# Altium PCB layout.PcbDoc (part 3 of 3)
Units mm, origin at the board's own origin, x right, y up, seen from the top; angles counter-clockwise.
Board outline 100.08 x 22.99 mm, 2 copper layers (Top Layer, Bottom Layer); 117 components, 109 nets, 394 pads, 168 vias.
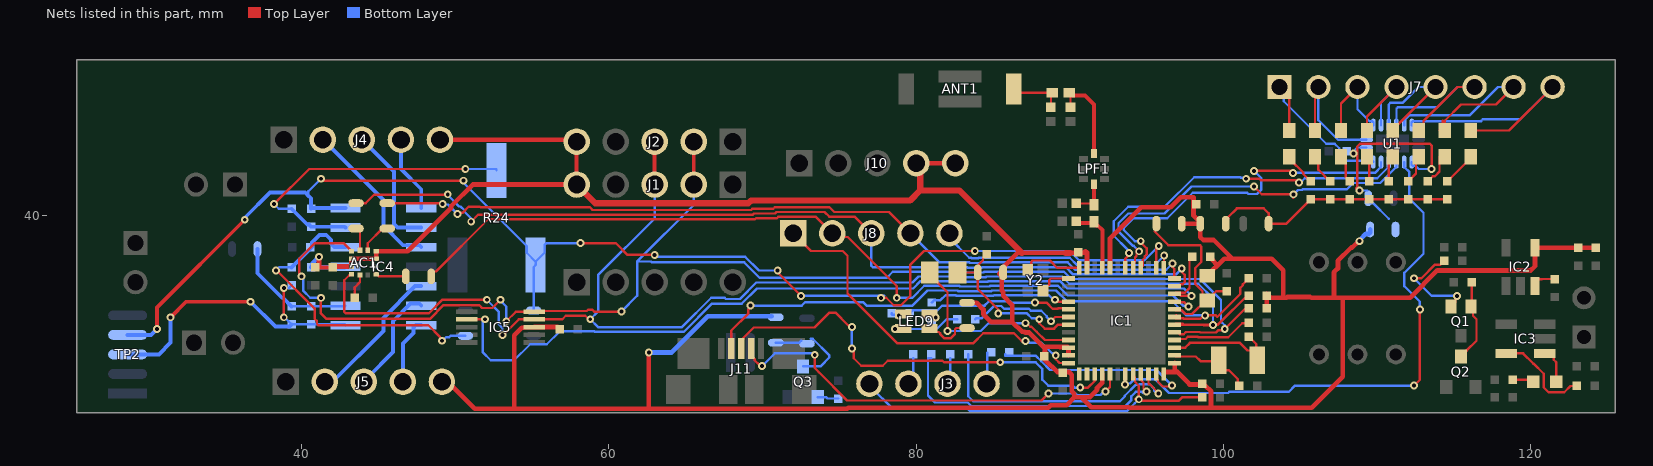
[diagram p2: the nets of this part, all layers, seen from the top]

## Via types
v1: diameter 0.508, hole 0.254, Top Layer to Bottom Layer, 166 vias
v2: diameter 1.016, hole 0.508, Top Layer to Bottom Layer, 2 vias

## Nets (pads, with @x,y where several pads share a name; then routed paths per layer and width w, separated by ;. In a path a pad name is that pad's centre, name@x,y a point inside that pad or via, vN(x,y) a via of type N, cw(c..) or ccw(c..) an arc to the next point about the centre after c; other vN are vias at no path point) (continued)
I2C1_SCL: AC1.1 IC1.5 IC5.10 J1.2 J2.2 R15.1 | length 90.2
  Top Layer w0.152: v1(40.005,36.068) 39.878,36.068 39.878,37.211 40.894,38.227 42.749,38.227 AC1.1@43.269,37.707 ; v1(41.275,34.671) 41.275,33.655 41.631,33.299 48.365,33.299 49.261,34.195 51.575,34.195 51.76,34.011 52.426,34.011 v1(52.959,34.544) ; v1(53.34,33.147) 53.959,33.766 IC5.10@55.159,33.766 55.2,33.807 58.575,33.807 58.654,33.886 58.948,33.886 59.068,33.766 60.817,33.766 v1(60.833,33.782) ; IC1.5@97.155,32.304 97.413,32.304 97.551,32.442 98.447,32.442 98.479,32.41 99.514,32.41 99.674,32.571 100.008,32.571 v1(100.076,32.639) 101.427,33.99 R15.1@101.651,33.99
  Top Layer w0.254: J1.2@65.532,42.037 J2.2@65.532,44.831
  Bottom Layer w0.152: v1(40.005,36.068) 40.005,35.972 40.136,35.84 40.136,35.114 40.582,34.669 41.277,34.669 v1(41.275,34.671) ; v1(52.959,34.544) 52.959,34.487 53.34,34.106 v1(53.34,33.147) ; v1(60.833,33.782) 61.85,34.799 61.85,37.028 ; J1.2@65.532,42.037 65.532,40.709 61.85,37.028 ; v1(100.076,32.639) 100.076,32.882 99.836,33.122 99.836,34.53 98.476,35.89 90.088,35.89 89.613,36.364 84.441,36.364 84.399,36.322 83.241,36.322 83.199,36.364 78.483,36.364 78.085,35.966 69.825,35.966 68.809,36.982 62.792,36.982 62.747,37.028 61.85,37.028
I2C1_SDA: AC1.4 IC1.6 IC5.9 J1.3 J2.3 R16.1 | length 85.8
  Top Layer w0.152: AC1.4@43.269,36.207 43.192,36.207 43.192,36.155 43.17,36.133 43.118,36.133 42.799,35.814 42.799,33.744 42.888,33.655 48.289,33.655 49.185,34.551 52.063,34.551 v1(52.07,34.544) ; v1(53.086,32.258) 53.133,32.258 54.142,33.266 54.666,33.266 IC5.9@54.737,33.337 ; IC5.9@55.159,33.266 56.974,33.266 57.211,33.503 58.476,33.503 58.705,33.274 v1(58.801,33.274) ; 97.357,32.996 96.887,32.996 IC1.6@96.816,32.925 96.887,32.925 97.357,32.925 98.664,32.925 ; R16.1@101.651,34.936 99.639,32.925 v1@99.282,32.925 ; 98.664,32.925 v1@99.282,32.925 ; 98.664,32.925 98.696,32.893 v1(99.314,32.893) v1@99.282,32.925
  Top Layer w0.254: J1.3@62.992,42.037 J2.3@62.992,44.831
  Bottom Layer w0.152: v1(52.07,34.544) 52.857,33.757 52.857,32.947 53.064,32.741 53.064,32.28 v1(53.086,32.258) ; J1.3@62.992,42.037 62.992,39.831 59.31,36.149 59.31,33.783 v1(58.801,33.274) 59.309,32.766 64.77,32.766 66.675,34.671 67.545,34.671 67.62,34.596 68.534,34.596 69.6,35.662 79.765,35.662 80.163,36.059 83.073,36.059 83.115,36.017 84.525,36.017 84.567,36.059 89.487,36.059 89.961,35.585 98.35,35.585 99.314,34.621 v1(99.314,32.893)
I2C1_SMBA: IC1.10 IC5.2 R14.1 | length 56.7
  Top Layer w0.152: IC5.2@50.759,33.266 50.767,33.274 v1(51.943,33.274) ; v1(97.917,34.798) 97.341,34.798 97.336,34.804 97.212,34.804 97.091,34.925 IC1.10@96.816,34.925 96.887,34.996 97.48,34.996 97.79,35.306 97.79,37.16 R14.1@97.968,37.338
  Bottom Layer w0.152: v1(51.943,33.274) 51.905,33.274 51.816,33.185 51.816,31.115 52.324,30.607 53.848,30.607 54.889,31.648 55.975,31.648 56.813,32.487 59.055,32.487 59.08,32.461 64.896,32.461 66.726,34.291 68.661,34.291 69.65,35.281 79.815,35.281 80.289,35.755 82.947,35.755 82.989,35.712 84.651,35.712 84.693,35.755 89.361,35.755 89.835,35.281 97.434,35.281 v1(97.917,34.798)
LED_1_BLUE: IC1.28 R38.1 | length 9.2
  Top Layer w0.152: v1@89.027,34.425 IC1.28@89.916,34.425
  Bottom Layer w0.152: R38.1@81.026,34.366 81.179,34.519 81.589,34.519 81.91,34.84 82.568,34.84 82.61,34.798 85.03,34.798 85.072,34.84 88.641,34.84 88.937,34.544 v1(89.027,34.544)
LED_1_GREEN: IC1.29 R39.2 | length 10.9
  Top Layer w0.152: v1(87.732,34.358) 88.489,34.358 88.895,33.952 89.197,33.952 89.244,33.999 89.662,33.999 89.736,33.925 IC1.29@89.916,33.925
  Bottom Layer w0.152: R39.2@79.578,33.655 79.777,33.854 80.582,33.854 80.591,33.863 81.396,33.863 81.696,34.163 84.455,34.163 84.734,34.442 86.143,34.442 86.227,34.358 v1@87.689,34.358
LED_1_RED: IC1.30 R37.2 | length 7.1
  Top Layer w0.152: v1@88.773,33.243 v1(88.773,33.147) 89.051,33.425 IC1.30@89.916,33.425
  Bottom Layer w0.152: R37.2@83.845,33.274 83.904,33.333 84.26,33.333 85.065,34.138 85.544,34.138 85.722,33.96 87.34,33.96 87.467,33.833 88.135,33.833 88.494,33.474 88.494,33.414 88.761,33.147 v1(88.773,33.147)
LED_MOSI: IC1.16 U1.14 | length 23.9
  Top Layer w0.152: v1(94.615,38.354) 94.615,38.274 94.996,37.894 94.996,37.494 94.869,37.367 94.869,37.276 94.737,37.145 94.737,36.746 IC1.16@94.616,36.625 ; v1(101.981,42.926) 104.394,42.926 v1(104.521,42.799)
  Bottom Layer w0.152: v1(94.615,38.354) 94.234,38.354 93.503,39.085 93.503,39.211 93.84,39.548 94.145,39.853 96.341,39.853 97.992,41.504 101.546,41.504 101.622,41.427 102.181,41.427 102.464,41.71 102.464,42.443 v1(101.981,42.926) ; v1(104.521,42.799) 109.853,42.799 110.248,43.194 U1.14@110.248,43.504
LED_PWM: IC1.18 U1.13 | length 23.7
  Top Layer w0.152: IC1.18@93.616,36.625 93.616,37.228 93.853,37.465 v1(93.853,37.592) ; v1(101.473,42.418) 102.315,42.418 102.416,42.316 104.715,42.316 104.715,42.097 104.781,42.164 v1(104.902,42.164)
  Bottom Layer w0.152: v1(93.853,37.592) 93.853,37.688 93.728,37.814 93.728,37.844 92.862,38.71 92.862,39.649 93.801,40.588 96.164,40.588 98.096,42.52 101.091,42.52 101.125,42.486 101.405,42.486 v1(101.473,42.418) ; v1(104.902,42.164) 104.998,42.164 105.282,42.448 110.002,42.448 110.748,43.194 U1.13@110.748,43.504
LED_PWR: R29.2 R30.2 R31.2 R32.2 R33.2 R34.2 R35.2 R36.2 SB13.2 SB14.2 | length 16.4
  Top Layer w0.152: SB14.2@100.139,39.497 100.139,39.649 100.304,39.813 100.304,39.921 100.87,40.488 102.616,40.488 102.933,40.17 SB13.2@102.933,39.497 104.089,39.497 R29.2@105.664,41.072 R30.2@106.934,41.072 R31.2@108.204,41.072 R32.2@109.474,41.072 R33.2@110.744,41.072 R34.2@112.014,41.072 R35.2@113.284,41.072 R36.2@114.554,41.072
LED_SCK: IC1.43 U1.11 | length 36.4
  Top Layer w0.152: v1(93.599,29.032) 93.599,29.464 93.616,29.481 IC1.43@93.616,29.725 ; v1(112.395,28.956) 112.776,29.337 v1(112.776,33.909)
  Bottom Layer w0.152: v1(93.599,29.032) 93.662,29.095 93.914,29.095 94.181,29.362 95.558,29.362 96.447,28.473 100.306,28.473 100.382,28.55 104.242,28.55 104.648,28.956 v1(112.395,28.956) ; U1.11@111.748,43.504 111.748,43.194 112.091,42.851 112.091,41.119 113.005,40.205 113.005,37.538 111.76,36.293 111.76,35.433 112.776,34.417 v1(112.776,33.909)
LED_SS: IC1.17 U1.12 | length 24.4
  Top Layer w0.152: IC1.17@94.116,36.625 94.116,36.883 94.19,36.957 94.19,36.974 94.237,37.021 94.237,37.294 94.336,37.392 v1@94.336,37.694 ; v1@94.336,37.846 94.488,37.694 v1(94.513,37.694) ; v1(101.981,41.91) 102.489,41.402 v1(104.542,41.402) v1@104.542,41.169
  Bottom Layer w0.152: v1(94.513,37.694) 94.158,38.049 94.108,38.049 93.167,38.99 93.167,39.523 93.801,40.157 96.164,40.157 97.917,41.91 v1(101.981,41.91) ; v1(104.542,41.402) 104.563,41.402 104.842,41.681 105.102,41.681 105.153,41.732 108.03,41.732 108.436,42.139 110.193,42.139 111.248,43.194 U1.12@111.248,43.504
LH_SIG: IC1.14 IC4.7 R24.1 R25.1 SB26.1 TP2.4 | length 89.2
  Top Layer w0.152: v1(41.275,42.418) 41.402,42.291 v1(50.546,42.291) ; v1(58.166,38.227) 60.452,38.227 61.214,37.465 v1(62.992,37.465) ; v1(70.993,36.449) 70.993,36.322 v1(72.517,34.798) ; v1(77.724,34.671) 78.058,34.671 78.54,34.188 79.019,34.188 79.629,34.798 79.629,36.83 80.518,37.719 v1(83.82,37.719) ; IC1.14@95.616,36.625 95.616,37.954 95.705,38.043 v1(95.783,38.043)
  Top Layer w0.254: v1(30.607,32.639) 30.607,34.036 v1(36.322,39.751)
  Bottom Layer w0.152: 40.45,41.338 40.45,41.593 v1(41.275,42.418) ; v1(50.546,42.291) 50.419,42.291 54.666,38.044 54.666,37.597 R24.1@55.245,37.019 ; SB26.1@55.118,33.846 55.118,36.676 R24.1@55.245,36.803 R24.1@55.245,37.019 ; v1(58.166,38.227) 55.951,38.227 55.824,38.1 55.824,37.597 R24.1@55.245,37.019 ; v1(62.992,37.465) 63.125,37.332 68.89,37.332 69.773,36.449 v1(70.993,36.449) ; v1(72.517,34.798) v1@77.931,34.798 ; v1(83.82,37.719) 89.983,37.719 90.593,37.109 94.849,37.109 v1(95.783,38.043)
  Bottom Layer w0.254: TP2.4@28.702,32.258 30.226,32.258 v1(30.607,32.639) ; v1(36.322,39.751) 36.322,39.878 37.973,41.529 40.259,41.529 40.45,41.338 40.64,41.148 R25.1@40.64,40.462 40.691,40.513 IC4.7@42.875,40.513
LPF_OUT: C19.2 IC4.5 R23.1 SB25.1 | length 21
  Top Layer w0.152: v1(38.354,36.449) 38.401,36.449 40.869,33.982 40.869,33.307 41.021,33.155 41.021,32.982 41.11,32.893 48.26,32.893 49.024,32.129 49.024,32.099 49.149,31.973 v1(49.149,31.877)
  Bottom Layer w0.152: v1(38.354,36.449) 38.557,36.652 C19.2@39.37,36.652 ; v1(49.149,31.877) 49.187,31.877 49.416,32.106 49.624,32.106 49.713,32.194 SB25.1@50.673,32.194
  Bottom Layer w0.254: C19.2@39.37,36.652 40.691,37.973 40.691,38.27 41.181,38.76 41.623,38.76 41.935,38.448 41.935,38.202 42.164,37.973 IC4.5@42.875,37.973
NetAC1_5: AC1.5 C25.1 | length 1.6
  Top Layer w0.152: C25.1@43.485,34.671 43.485,35.357 43.819,35.691 AC1.5@43.819,36.157
NetAC1_7: AC1.7 SB16.1 | length 2
  Top Layer w0.152: AC1.7@44.869,36.207 44.894,36.207 45.033,36.068 SB16.1@46.799,36.068
NetAC1_11: AC1.11 SB18.1 | length 2.1
  Top Layer w0.152: AC1.11@44.319,37.757 44.319,38.223 45.276,39.179 SB18.1@45.593,39.179
  Top Layer w0.254: AC1.11@44.319,37.757 AC1.11@44.323,37.761
NetAC1_12: AC1.12 SB17.1 | length 1.6
  Top Layer w0.152: SB17.1@43.561,39.179 43.655,39.179 43.819,39.015 AC1.12@43.819,37.757
NetANT1_1: ANT1.1 C28.2 L3.2 | length 3.6
  Top Layer w0.152: ANT1.1@86.36,48.26 86.614,48.006 L3.2@88.858,48.006 88.773,47.921 C28.2@88.773,47.069
NetC5_2: C5.2 L1.2 LPF1.8 | length 2.6
  Top Layer w0.152: C5.2@90.424,40.809 91.482,40.809 L1.2@91.567,40.724
  Top Layer w0.254: L1.2@91.567,40.724 LPF1.8@91.567,42.18
NetC16_1: C16.1 IC2.3 | length 1.6
  Top Layer w0.152: IC2.3@120.269,35.433 120.269,35.649 120.493,35.872 120.708,35.872 120.726,35.89 C16.1@121.539,35.89
NetC20_2: C20.2 IC4.2 R26.1 SB15.2 | length 8.2
  Bottom Layer w0.152: R26.1@39.37,34.112 C20.2@40.64,34.112 42.824,34.112 IC4.2@42.875,34.163
  Bottom Layer w0.254: SB15.2@37.148,37.846 37.148,36.266 38.741,34.673 38.81,34.673 R26.1@39.37,34.112
NetC26_2: C26.2 SB23.2 SB24.2 U1.10 U1.16 | length 14.3
  Top Layer w0.152: v1(108.839,41.656) 108.788,41.656 108.641,41.804 108.708,41.871 108.708,42.61 108.7,42.617 108.7,44.514 108.89,44.704 113.411,44.704 113.538,44.577 v1(113.538,43.053)
  Bottom Layer w0.152: 108.585,44.323 108.716,44.454 U1.16@109.298,44.454 ; v1(108.839,41.656) 109.347,41.656 ; SB23.2@109.41,41.148 109.41,40.996 109.575,40.832 109.726,40.832 110.744,39.814 ; U1.10@112.248,43.504 112.248,43.319 112.316,43.251 112.501,43.251 112.699,43.053 v1(113.538,43.053)
  other v1: 108.458,44.069
NetC27_2: C27.2 L3.1 LPF1.4 | length 5.8
  Top Layer w0.152: L3.1@89.958,48.006 90.043,47.921 C27.2@90.043,47.069
  Top Layer w0.254: L3.1@90.043,47.921 90.131,47.833 90.978,47.833 91.567,47.244 LPF1.4@91.567,44.18
NetD1_4: 
NetD1_6: 
NetDS1_1: DS1.1 R18.1 | length 1.4
  Top Layer w0.152: R18.1@118.821,29.337 120.027,29.337 DS1.1@120.154,29.21
NetDS1_2: DS1.2 IC3.1 | length 2.4
  Top Layer w0.152: IC3.1@120.884,31.054 121.261,31.054 121.485,30.83 121.485,30.637 121.654,30.468 DS1.2@121.654,29.21
NetIC1_4: IC1.4 R17.2 | length 5
  Top Layer w0.152: IC1.4@97.155,31.996 97.536,31.996 97.678,32.138 98.321,32.138 98.353,32.106 100.305,32.106 101.219,33.02 101.628,33.02 R17.2@101.651,33.043
NetIC3_5: IC3.5 R19.2 | length 6.3
  Top Layer w0.152: IC3.5@118.384,31.054 119.489,31.054 120.153,30.39 120.169,30.39 120.833,29.726 120.833,28.835 121.138,28.531 122.17,28.531 122.572,28.933 122.964,28.933 R19.2@122.987,28.956
NetIC4_6: IC4.6 R24.2 R25.2 R27.2 | length 20.8
  Top Layer w0.152: v1(38.227,40.767) 40.513,43.053 v1(50.673,43.053)
  Bottom Layer w0.152: v1(38.227,40.767) 38.532,40.462 R27.2@39.37,40.462 ; v1(50.673,43.053) 52.705,43.053 R24.2@52.705,42.953
  Bottom Layer w0.254: R27.2@39.37,40.462 40.39,39.442 40.492,39.442 R25.2@40.64,39.294 42.824,39.294 IC4.6@42.875,39.243
NetJ3_2: J3.2 R1.2 | length 2.5
  Bottom Layer w0.152: R1.2@84.633,31.115 84.633,28.905 J3.2@84.836,28.702
NetJ3_3: J3.3 R2.2 | length 2.1
  Bottom Layer w0.152: R2.2@82.22,30.734 82.22,28.778 J3.3@82.296,28.702
NetJ3_4: J3.4 R3.2 | length 2.2
  Bottom Layer w0.152: J3.4@79.756,28.575 79.756,28.702 79.807,28.753 R3.2@79.807,30.734
NetLED1_2: LED1.2 R29.1 | length 2.1
  Top Layer w0.152: LED1.2@104.394,43.854 104.394,43.608 105.184,42.819 105.184,42.721 R29.1@105.664,42.24
NetLED2_2: LED2.2 R30.1 | length 1.9
  Top Layer w0.152: LED2.2@106.172,43.854 106.172,43.002 R30.1@106.934,42.24
NetLED3_2: LED3.2 R31.1 | length 1.7
  Top Layer w0.152: LED3.2@107.95,43.854 107.95,42.494 R31.1@108.204,42.24
NetLED4_2: LED4.2 R32.1 | length 1.6
  Top Layer w0.152: R32.1@109.474,42.24 LED4.2@109.474,43.854
NetLED5_2: LED5.2 R33.1 | length 1.7
  Top Layer w0.152: R33.1@110.744,42.24 110.744,43.6 LED5.2@110.998,43.854
NetLED6_2: LED6.2 R34.1 | length 1.8
  Top Layer w0.152: R34.1@112.014,42.24 112.522,42.748 LED6.2@112.522,43.854
NetLED7_2: LED7.2 R35.1 | length 2
  Top Layer w0.152: R35.1@113.284,42.24 113.614,42.57 113.738,42.57 114.046,42.878 LED7.2@114.046,43.854
NetLED8_2: LED8.2 R36.1 | length 2.7
  Top Layer w0.152: R36.1@114.554,42.24 116.167,43.853 116.122,43.898 LED8.2@115.868,44.152
NetLED9_1: LED9.1 SB22.2 | length 3.2
  Top Layer w0.152: LED9.1@80.86,32.672 81.084,32.448 81.47,32.448 81.559,32.359 81.559,32.312 81.842,32.029 82.242,32.029 82.525,32.312 82.525,32.613 82.614,32.703 SB22.2@83.312,32.703
NetLED9_2: LED9.2 R38.2 | length 0.5
  Top Layer w0.152: v1(81.28,33.38) LED9.2@81.28,33.528
  Bottom Layer w0.152: R38.2@81.026,33.198 81.225,33.397 81.276,33.397 81.28,33.392 v1(81.28,33.38)
NetLED9_3: LED9.3 R39.1 | length 0.5
  Bottom Layer w0.152: R39.1@78.41,33.655 78.41,33.604 78.443,33.571 78.824,33.571 v1(78.867,33.528)
NetLED9_4: LED9.4 R37.1 | length 4.3
  Bottom Layer w0.152: v1(78.613,32.639) 80.772,32.639 80.827,32.694 81.396,32.694 81.975,33.274 R37.1@82.677,33.274
NetQ1_1: Q1.1 Q2.3 R20.1 | length 5.5
  Top Layer w0.152: Q2.3@115.443,30.861 115.443,30.911 115.767,31.235 115.817,31.235 116.459,31.877 116.459,33.274 116.225,33.508 116.225,33.965 Q1.1@116.093,34.097 116.154,34.158 R20.1@116.154,35.687
NetQ1_2: Q1.2 R21.1 | length 6.6
  Top Layer w0.152: v1(112.395,35.941) 112.872,35.941 113.761,36.83 114.097,36.83 R21.1@114.351,37.084 R21.1@114.3,37.135 ; Q1.2@114.793,34.097 115.067,34.371 115.067,34.58 115.189,34.702 v1(115.189,34.798)
  Bottom Layer w0.152: v1(112.395,35.941) 113.538,34.798 v1(115.189,34.798)
NetQ3_1: Q3.1 R28.2 | length 1.4
  Bottom Layer w0.152: Q3.1@73.594,28.21 74.152,28.21 74.244,28.118 R28.2@74.93,28.118
NetQ3_3: Q3.3 SB19.2 SB20.2 | length 5.4
  Bottom Layer w0.152: SB20.2@70.866,31.75 72.39,31.75 SB19.2@72.517,31.877 ; Q3.3@72.644,30.21 73.771,30.21 74.359,30.798 74.359,30.924 73.279,32.004 73.152,32.004
NetR4_1: 
NetR5_1: 
NetR6_1: 
NetR7_1: 
NetR8_1: 
NetR9_2: 
NetR10_2: 
NetR11_2: 
NetR12_2: 
NetR13_2: 
NRST: C9.1 IC1.7 J11.4 | length 40.7
  Top Layer w0.152: J11.4@67.969,31.377 67.969,32.536 69.088,33.655 69.088,33.94 69.215,34.067 v1(69.215,34.163) ; IC1.7@96.919,33.528 IC1.7@96.816,33.425 96.89,33.351 97.357,33.351 97.398,33.31 98.492,33.31 98.71,33.528 v1(98.806,33.528) 99.492,33.528 99.593,33.426 101.096,34.929 101.096,35.327 101.26,35.491 101.26,35.55 C9.1@101.651,35.941
  Bottom Layer w0.152: v1(69.215,34.163) 72.564,34.163 72.793,34.392 76.543,34.392 76.772,34.163 79.756,34.163 80.738,35.145 82.694,35.145 82.736,35.103 84.904,35.103 84.946,35.145 89.108,35.145 89.812,34.442 96.665,34.442 97.578,33.528 v1(98.806,33.528)
OP_3IN_N: IC4.9 J4.3 | length 8.2
  Bottom Layer w0.254: J4.3@43.942,44.958 46.025,42.875 46.025,39.468 46.25,39.243 IC4.9@47.803,39.243
OP_3IN_O: IC4.8 J4.4 | length 5
  Bottom Layer w0.254: J4.4@46.482,44.958 46.482,43.053 47.803,41.732 IC4.8@47.803,40.513
OP_3IN_P: IC4.10 J4.2 | length 10.3
  Bottom Layer w0.254: J4.2@41.402,44.958 45.339,41.021 45.339,39.37 46.619,38.09 47.686,38.09 IC4.10@47.803,37.973
OP_4IN_N: IC4.13 J5.3 | length 7.2
  Bottom Layer w0.254: J5.3@44.069,29.21 44.323,29.21 44.323,29.488 45.974,31.139 45.974,33.147 47.117,34.29 47.676,34.29 IC4.13@47.803,34.163
OP_4IN_O: IC4.14 J5.4 | length 4.4
  Bottom Layer w0.254: J5.4@46.609,29.21 46.609,31.699 47.291,32.381 47.291,32.741 47.444,32.893 IC4.14@47.803,32.893
OP_4IN_P: IC4.12 J5.2 | length 9.4
  Bottom Layer w0.254: J5.2@41.529,29.21 42.037,29.21 45.339,32.512 45.339,33.364 47.408,35.433 IC4.12@47.803,35.433
PA0: IC1.9 J8.2 SB16.2 | length 55.6
  Top Layer w0.152: SB16.2@48.45,36.068 48.45,36.22 48.615,36.384 48.766,36.384 52.16,39.777 69.513,39.777 69.588,39.853 70.951,39.853 71.052,39.953 73.458,39.953 J8.2@74.549,38.862 74.787,38.624 75.549,38.624 78.74,35.433 v1(78.74,34.671) ; IC1.9@96.816,34.425 97.147,34.425 97.147,34.406 97.165,34.388 97.438,34.388 97.724,34.102 v1(97.724,34.097)
  Bottom Layer w0.152: v1(78.74,34.671) 79.756,34.671 80.535,35.45 82.82,35.45 82.863,35.408 84.777,35.408 84.82,35.45 89.235,35.45 89.864,34.82 96.717,34.82 97.393,34.144 97.678,34.144 v1(97.724,34.097)
PA2: IC1.11 J8.3 SB17.2 | length 60
  Top Layer w0.152: SB17.2@43.561,40.831 SB17.2@43.561,40.831 44.191,40.832 44.736,41.377 49.505,41.377 v1(49.53,41.402) ; v1(51.054,39.624) 51.512,40.082 69.387,40.082 69.462,40.157 70.825,40.157 70.926,40.258 74.042,40.258 74.347,39.953 75.998,39.953 J8.3@77.089,38.862 ; IC1.11@96.816,35.425 97.091,35.425 97.212,35.546 97.336,35.546 97.47,35.68 97.47,36.17 97.282,36.357 v1(97.282,36.576)
  Bottom Layer w0.152: v1(49.53,41.402) 49.53,41.351 50.267,40.615 50.365,40.615 50.648,40.332 50.648,40.234 51.054,39.827 v1(51.054,39.624) ; J8.3@77.089,38.862 77.089,36.758 77.178,36.669 83.325,36.669 83.368,36.627 84.272,36.627 84.315,36.669 89.74,36.669 90.214,36.195 96.901,36.195 v1(97.282,36.576)
PA3: IC1.12 J8.4 SB18.2 | length 54.6
  Top Layer w0.152: SB18.2@45.593,40.831 49.136,40.831 v1(49.2,40.767) ; v1(50.165,40.132) 50.227,40.194 50.481,40.194 50.876,40.589 51.63,40.589 51.656,40.563 58.776,40.563 58.951,40.387 69.261,40.387 69.336,40.462 70.699,40.462 70.799,40.563 74.364,40.563 74.669,40.258 78.233,40.258 J8.4@79.629,38.862 ; v1(96.672,36.9) 96.672,36.678 96.79,36.56 96.79,35.925 IC1.12@96.816,35.925
  Bottom Layer w0.152: v1(49.2,40.767) 49.224,40.743 49.554,40.743 v1(50.165,40.132) ; J8.4@79.629,38.862 81.517,36.974 83.452,36.974 83.494,36.932 84.146,36.932 84.188,36.974 89.866,36.974 90.34,36.5 96.272,36.5 v1(96.672,36.9)
PA4: IC1.13 J8.5 | length 16.1
  Top Layer w0.152: IC1.13@96.116,36.625 96.128,36.637 96.128,37.406 v1(96.14,37.418)
  Bottom Layer w0.152: J8.5@82.169,38.862 82.169,38.561 83.451,37.279 83.578,37.279 83.62,37.236 84.02,37.236 84.062,37.279 89.992,37.279 90.466,36.805 95.526,36.805 v1(96.14,37.418)
PA10: IC1.36 J8.1 | length 23.5
  Top Layer w0.152: J8.1@72.009,38.862 73.152,37.719 75.231,37.719 75.54,37.411 75.54,34.95 78.765,31.725 83.737,31.725 84.372,32.36 86.36,32.36 86.868,31.852 v1(87.122,31.852) ; v1(89.085,30.929) 89.085,30.676 89.336,30.425 IC1.36@89.916,30.425
  Bottom Layer w0.152: v1(87.122,31.852) 87.19,31.784 87.356,31.784 87.389,31.75 88.148,31.75 88.838,31.06 88.857,31.06 88.988,30.929 v1(89.085,30.929)
RCC_OSC32_IN: C2.1 IC1.2 Y1.1 | length 5.4
  Top Layer w0.152: IC1.2@96.816,30.925 96.887,30.854 98.198,30.854 98.499,30.553 99.641,30.553 Y1.1@99.695,30.607 99.695,30.553 99.695,30.391 100.119,29.968 100.334,29.968 100.932,29.37 100.932,29.04 C2.1@101.016,28.956
RCC_OSC32_OUT: C3.1 IC1.3 Y1.2 | length 7.6
  Top Layer w0.152: IC1.3@96.816,31.425 97.499,31.425 97.809,31.736 101.066,31.736 101.556,31.246 101.771,31.246 Y1.2@102.135,30.882 ; C3.1@101.651,32.131 102.135,31.646 Y1.2@102.135,30.882 ; Y1.2@102.195,30.607 102.135,30.666 Y1.2@102.135,30.882
RCC_OSC_IN: IC1.25 Y2.3 | length 2.2
  Top Layer w0.152: Y2.3@88.257,35.139 88.257,35.164 88.531,35.438 88.562,35.438 88.651,35.527 88.651,35.819 88.757,35.925 IC1.25@89.916,35.925
RCC_OSC_OUT: IC1.24 Y2.1 | length 4
  Top Layer w0.152: Y2.1@87.257,36.489 87.486,36.718 87.486,37.003 87.575,37.093 88.702,37.093 89.169,36.625 IC1.24@90.616,36.625
RF_OUT: C4.2 IC1.21 L1.1 | length 4.4
  Top Layer w0.254: C4.2@90.424,39.666 90.541,39.549 91.567,39.549 91.74,39.376 91.815,39.376 92.116,39.075 IC1.21@92.116,36.625
SR_0: J7.1 LED1.1 U1.15 | length 12.1
  Top Layer w0.152: J7.1@103.632,48.387 104.267,47.752 LED1.1@104.267,45.554 ; LED1.1@104.406,45.977 LED1.1@104.578,45.977
  Bottom Layer w0.152: J7.1@103.632,48.387 103.924,48.095 103.924,47.46 106.684,44.7 107.227,44.7 107.523,44.404 107.523,43.826 107.763,43.586 109.68,43.586 109.748,43.518 U1.15@109.748,43.504
SR_1: J7.2 LED2.1 U1.1 | length 8.7
  Top Layer w0.152: LED2.1@105.954,45.554 105.954,48.169 J7.2@106.172,48.387
  Bottom Layer w0.152: J7.2@106.172,48.387 106.172,46.228 107.446,44.954 U1.1@109.298,44.954
SR_2: J7.3 LED3.1 U1.2 | length 6.3
  Top Layer w0.152: LED3.1@107.642,45.554 107.642,47.317 J7.3@108.712,48.387
  Bottom Layer w0.152: J7.3@108.712,48.387 108.712,46.94 109.495,46.157 109.68,46.157 109.748,46.089 U1.2@109.748,45.904
SR_3: J7.4 LED4.1 U1.3 | length 6.5
  Top Layer w0.152: LED4.1@109.329,45.554 109.329,46.464 J7.4@111.252,48.387
  Bottom Layer w0.152: U1.3@110.248,45.904 110.248,47.383 J7.4@111.252,48.387
SR_4: J7.5 LED5.1 U1.4 | length 8.9
  Top Layer w0.152: LED5.1@111.016,45.554 111.016,45.654 111.34,45.978 111.383,45.978 J7.5@113.792,48.387
  Bottom Layer w0.152: U1.4@110.748,45.904 110.748,47.248 110.871,47.371 111.673,47.371 112.689,48.387 J7.5@113.792,48.387
SR_5: J7.6 LED6.1 U1.5 | length 11.8
  Top Layer w0.152: LED6.1@112.703,45.554 113.009,45.86 113.009,46.167 115.229,48.387 J7.6@116.332,48.387
  Bottom Layer w0.152: U1.5@111.276,45.932 U1.5@111.248,45.904 111.248,46.977 111.337,47.066 113.908,47.066 115.229,48.387 J7.6@116.332,48.387
SR_6: J7.7 LED7.1 U1.6 | length 15.1
  Top Layer w0.152: LED7.1@114.046,45.554 114.265,45.773 114.265,46.193 ; LED7.1@114.391,45.554 LED7.1@114.391,45.554 114.392,46.193 115.443,47.244 117.729,47.244 J7.7@118.872,48.387
  Bottom Layer w0.152: U1.6@111.748,45.904 111.748,46.214 112.091,46.558 116.027,46.558 117.856,48.387 J7.7@118.872,48.387
SR_7: J7.8 LED8.1 U1.7 | length 16.8
  Top Layer w0.152: LED8.1@116.078,45.554 118.579,45.554 J7.8@121.412,48.387
  Bottom Layer w0.152: U1.7@112.248,45.904 112.248,46.089 112.316,46.157 116.769,46.157 116.769,46.195 116.858,46.284 119.309,46.284 J7.8@121.412,48.387
SYS_SWCLK: IC1.41 J11.2 | length 27.7
  Top Layer w0.152: J11.2@69.269,31.377 69.269,30.902 69.393,30.778 69.401,30.778 69.49,30.689 69.49,30.607 69.804,30.294 69.909,30.294 v1(69.977,30.226) ; v1(73.406,30.963) 73.406,30.099 73.66,29.845 73.66,29.834 75.502,27.992 88.157,27.992 v1(88.613,28.448) ; v1@92.425,28.575 v1(92.329,28.575) 92.616,28.862 IC1.41@92.616,29.725
  Bottom Layer w0.152: v1@69.869,30.334 70.085,30.334 70.814,31.063 73.21,31.063 73.31,30.963 v1(73.406,30.963) ; v1(88.613,28.448) 90.377,28.448 90.478,28.346 92.004,28.346 92.233,28.575 v1(92.329,28.575)
SYS_SWDIO: IC1.39 J11.3 | length 28.7
  Top Layer w0.152: J11.3@68.619,31.377 68.619,31.852 68.743,31.976 68.751,31.976 68.751,32.057 69.431,32.738 73.394,32.738 74.364,33.708 74.75,33.708 75.567,32.891 75.597,32.891 75.723,32.766 v1(75.819,32.766) ; v1@75.946,31.369 75.946,30.734 76.429,30.251 77.829,30.251 78.159,30.582 81.716,30.582 81.818,30.48 v1(85.471,30.48) ; v1(90.678,28.829) 91.186,28.829 91.616,29.259 IC1.39@91.616,29.725
  Bottom Layer w0.152: v1(75.819,31.369) v1(75.819,32.766) ; v1(85.471,30.48) 87.773,30.48 88.079,30.174 88.213,30.04 88.213,29.341 88.599,28.956 90.17,28.956 90.297,28.829 v1(90.678,28.829)
TRANS_IMP_OUT: C19.1 C20.1 IC4.1 R26.2 TP2.3 | length 20.5
  Top Layer w0.152: v1(38.862,33.401) v1(38.862,35.306)
  Top Layer w0.254: v1(31.496,33.401) 32.512,34.417 v1(36.703,34.417)
  Bottom Layer w0.152: v1(38.862,33.401) 38.913,33.401 R26.2@39.37,32.944 C20.1@40.64,32.944 42.824,32.944 IC4.1@42.875,32.893 ; v1(38.862,35.306) 39.192,35.306 C19.1@39.37,35.484
  Bottom Layer w0.254: TP2.3@28.702,30.988 30.734,30.988 31.496,31.75 v1(31.496,33.401) ; v1(36.703,34.417) 38.324,32.796 39.222,32.796 R26.2@39.37,32.944
TSC_G2_IO1: C1.1 IC1.44 J3.5 | length 25
  Top Layer w0.152: IC1.44@94.116,29.725 94.158,29.683 94.107,29.632 94.237,29.502 94.237,29.205 94.488,28.955 v1@94.488,28.273 ; v1@94.257,28.071 94.261,28.067 v1@94.282,28.067 ; C1.1@98.603,28.194 97.303,28.194 97.075,27.965 94.399,27.965 v1@94.309,28.056 ; v1@94.282,28.067 v1@94.488,28.273 ; v1@94.282,28.067 94.271,28.056 v1@94.309,28.056 ; v1@94.282,28.067 v1@94.298,28.067 ; v1@94.298,28.067 v1(94.488,28.067) v1@94.488,28.273 ; v1@94.298,28.067 v1@94.309,28.056
  Bottom Layer w0.152: J3.5@77.216,28.702 78.359,27.559 83.237,27.559 83.491,27.305 93.717,27.305 94.225,27.813 94.229,27.808 v1(94.488,28.067)
TSC_G2_IO2: IC1.45 R3.1 | length 19
  Top Layer w0.152: IC1.45@94.616,29.725 94.616,29.327 94.793,29.15 94.793,28.778 v1(94.996,28.575)
  Bottom Layer w0.152: R3.1@80.975,30.734 80.772,30.734 80.772,28.321 81.229,27.864 83.364,27.864 83.592,27.635 93.616,27.635 94.005,28.025 94.005,28.267 94.288,28.55 94.695,28.55 94.742,28.503 94.814,28.575 v1(94.996,28.575)
TSC_G2_IO3: IC1.46 R2.1 | length 17.6
  Top Layer w0.152: IC1.46@95.116,29.725 95.116,29.09 95.148,29.058 95.196,29.058 95.758,28.495 v1(95.758,28.448)
  Bottom Layer w0.152: R2.1@83.388,30.988 83.388,28.27 83.718,27.94 93.265,27.94 93.574,28.248 93.574,28.296 94.272,28.994 94.479,28.994 94.542,29.058 95.196,29.058 95.479,28.775 95.479,28.631 95.662,28.448 v1(95.758,28.448)
TSC_G2_IO4: IC1.47 R1.1 | length 13.4
  Top Layer w0.152: IC1.47@95.616,29.725 95.616,29.45 95.737,29.329 95.737,29.205 96.046,28.897 96.588,28.897 v1(96.647,28.956)
  Bottom Layer w0.152: R1.1@85.801,30.988 85.801,30.912 87.773,30.912 88.145,30.54 88.712,29.972 95.631,29.972 v1(96.647,28.956)
USB_DN: IC1.37 | length 0.2
  Top Layer w0.152: IC1.37@90.616,29.526 IC1.37@90.616,29.725
USB_DP: IC1.38
VCC: AC1.2 AC1.3 AC1.9 AC1.10 C7.1 C8.1 C11.1 C12.1 C13.1 C14.1 C15.1 C21.1 C22.1 C23.1 C24.1 FB1.2 IC1.1 IC1.20 IC1.23 IC1.34 IC1.35 IC1.40 IC1.48 IC2.4 IC4.4 IC5.8 J1.5 J2.5 J4.5 J5.5 J10.4 J10.5 R14.2 R15.2 R16.2 SB11.2 SB12.2 SB14.1 SB20.1 SB22.1 SB24.1 | length 242.8
  Top Layer w0.254: C24.1@41.148,36.652 C23.1@42.037,36.652 ; J1.5@57.912,42.037 J2.5@57.912,44.831
  Top Layer w0.305: C24.1@41.148,36.652 v1(41.148,37.338) ; C23.1@42.037,36.652 42.088,36.703 43.245,36.703 43.249,36.707 AC1.3@43.269,36.707 AC1.2@43.269,37.207 AC1.9@44.869,37.207 AC1.10@44.869,37.707 46.93,37.707 49.759,40.536 49.759,40.643 51.153,42.037 J1.5@57.912,42.037 ; J4.5@49.022,44.958 57.785,44.958 J2.5@57.912,44.831 ; J5.5@49.149,29.21 49.53,29.21 51.292,27.447 53.848,27.447 ; C22.1@56.82,32.639 56.693,32.766 IC5.8@55.159,32.766 55.157,32.764 54.522,32.764 54.479,32.721 54.333,32.721 53.848,32.236 53.848,27.447 ; v1(62.611,31.115) 62.611,27.447 ; J10.4@80.01,43.434 80.264,43.434 J10.5@82.55,43.434 ; SB22.1@83.312,34.353 83.326,34.339 83.948,34.339 84.379,33.908 84.379,33.604 84.891,33.092 86.26,33.092 ; 85.579,35.134 85.579,36.087 85.42,36.246 85.579,36.404 85.579,36.557 86.614,37.592 86.868,37.592 89.738,37.592 ; 85.661,35.052 85.661,34.798 86.26,34.199 86.26,33.092 ; C11.1@88.341,31.115 88.381,31.076 88.381,31.496 89.339,31.496 89.365,31.47 89.86,31.47 89.91,31.419 89.91,30.927 89.913,30.925 IC1.35@89.916,30.925 ; 88.341,31.423 87.681,32.083 87.353,32.41 87.099,32.41 87.049,32.461 86.891,32.461 86.26,33.092 ; C11.1@88.381,30.988 88.381,30.647 89.182,29.845 89.941,29.845 90.119,29.666 90.119,28.598 90.297,28.42 90.297,28.194 ; 90.043,37.592 90.919,37.592 91.014,37.687 ; IC1.23@91.116,36.625 91.116,37.643 ; IC1.40@92.116,29.725 92.114,29.723 92.114,29.134 92.098,29.134 91.77,28.806 91.77,28.679 91.299,28.208 91.313,28.194 90.754,28.194 ; IC1.20@92.616,36.625 92.616,38.542 94.638,40.564 96.571,40.564 97.218,41.212 98.044,41.212 98.044,40.031 98.285,39.79 98.395,39.79 98.489,39.696 SB14.1@98.489,39.497 ; IC1.48@96.116,29.725 96.116,29.843 96.118,29.845 96.977,29.845 ; IC1.1@96.816,30.425 96.823,30.425 96.826,30.423 96.826,29.996 96.977,29.845 ; SB12.2@97.282,39.497 SB14.1@98.489,39.497 ; C7.1@98.527,29.032 97.79,29.032 96.977,29.845 ; C7.1@98.603,29.083 98.725,28.96 98.817,28.96 99.187,28.591 99.187,27.559 ; FB1.2@98.933,36.106 98.983,36.106 99.281,36.404 99.281,36.454 99.659,36.832 ; R14.2@99.136,37.338 99.259,37.215 99.259,37.139 99.566,36.832 99.659,36.832 ; R15.2@102.819,33.99 R16.2@102.819,34.798 102.819,34.936 103.085,34.671 103.886,34.671 ; v1(108.839,38.354) 108.784,38.354 108.373,37.943 108.317,37.943 107.442,37.068 107.442,36.583 107.182,36.323 107.187,34.671 ; C14.1@124.206,37.922 C15.1@123.063,37.922 123.052,37.933 IC2.4@120.269,37.933 120.269,36.739 119.979,36.449 113.919,36.449 112.141,34.671 107.823,34.671 ; 53.848,27.447 62.611,27.447 ; 62.611,27.447 75.508,27.447 75.589,27.528 88.591,27.528 88.75,27.686 89.789,27.686 90.297,28.194 ; 90.297,28.194 90.754,28.194 ; 90.754,28.194 91.389,27.559 93.825,27.559 93.876,27.508 99.136,27.508 99.187,27.559 ; SB14.1@98.489,39.497 98.489,38.613 98.671,38.43 99.365,38.43 100.584,37.211 ; 99.187,27.559 99.238,27.508 105.74,27.508 107.757,29.525 107.757,34.605 107.823,34.671 ; 99.659,36.832 100.038,37.211 100.584,37.211 ; 100.584,37.211 103.124,37.211 103.886,36.449 103.886,34.671 ; 103.886,34.671 104.112,34.671 104.163,34.722 105.649,34.722 105.7,34.671 107.187,34.671 ; 107.187,34.671 107.823,34.671
  Top Layer w0.406: J1.5@57.912,42.037 59.13,40.819 69.082,40.819 69.257,40.995 79.603,40.995 80.264,41.656 ; J10.4@80.264,43.434 80.264,41.656 ; 86.868,37.592 82.804,41.656 80.264,41.656 ; 89.738,37.592 90.043,37.592
  Bottom Layer w0.305: v1(41.148,37.338) 40.763,36.953 40.763,36.775 C21.1@40.64,36.652 42.824,36.652 IC4.4@42.875,36.703 ; v1(62.611,31.115) 64.089,31.115 66.438,33.465 SB20.1@70.612,33.465 ; v1(108.839,38.354) 108.878,38.393 108.878,38.456 109.245,38.823 109.444,38.823 109.537,38.917 SB24.1@109.537,39.116
VDDA/VREF: C10.1 FB1.1 IC1.8 SB12.1 | length 11.6
  Top Layer w0.152: 95.504,38.989 95.52,38.989 96.409,38.1 98.463,38.1 98.552,38.011 98.552,36.998 98.158,36.604 98.158,35.573 98.636,35.095 98.636,34.803 98.888,34.551 FB1.1@98.933,34.506 ; IC1.8@96.816,33.925 96.89,33.851 97.288,33.851 97.336,33.804 97.524,33.615 97.953,33.615 98.844,34.506 FB1.1@98.933,34.506 ; C10.1@100.203,35.103 99.53,35.103 99.357,34.93 99.357,34.88 98.983,34.506 FB1.1@98.933,34.506
VFBSMPS: C6.1 IC1.31 L2.2 SB11.1 | length 10.7
  Top Layer w0.152: L2.2@82.815,36.322 SB11.1@84.01,36.322 84.01,35.242 85.344,33.909 v1(85.344,33.655) ; 84.074,36.83 84.353,37.109 84.353,37.228 84.383,37.258 84.383,37.317 C6.1@84.582,37.516 ; C6.1@84.709,37.503 84.722,37.516 C6.1@84.722,37.529 ; v1(88.011,33.274) 88.011,33.02 88.367,32.664 88.977,32.664 89.237,32.925 IC1.31@89.916,32.925
  Bottom Layer w0.152: v1@85.344,33.782 v1(85.344,33.655) 87.214,33.655 87.528,33.34 87.945,33.34 v1(88.011,33.274)
VLXSMPS: IC1.33 L2.1 | length 12.9
  Top Layer w0.152: L2.1@80.888,36.322 80.888,36.172 81.387,35.673 81.4,35.673 82.042,35.031 v1(82.042,32.512) ; v1(87.122,33.02) 87.122,33.097 87.428,32.791 87.511,32.791 87.839,32.464 88.378,31.925 IC1.33@89.916,31.925
  Bottom Layer w0.152: v1(82.042,32.512) 84.201,32.512 84.709,33.02 v1(87.122,33.02)
pads on no net: ANT1.2 ANT1.3 ANT1.4 IC1.26 IC1.27 IC2.1 J1.4 J2.4 LPF1.2 LPF1.6 Q3.2 R24.3 S1.1 S1.4 S1.5 S1.6 TP3.1 TP3.2 U1.9 U1.17 Y2.2 Y2.4

## Polygon pours and split planes (outlines as drawn)
GND on Top Layer "Top Layer-GND" (solid, remove dead copper, pour order 6): 79.629,49.784 79.629,36.957 105,36.957 105,49.784
VCC on Top Layer "Top Layer-VCC" (solid, remove dead copper, pour order 8): 30.48,40.64 30.48,27.686 124.968,27.686 125.095,27.813 125.095,42.037 105.41,42.037 105.41,30.607 78.74,30.607 78.74,40.64
GND on Bottom Layer "Bottom Layer-GND" (solid, remove dead copper, pour order 2): 125.095,49.784 125.095,27.432 25.654,27.432 25.654,49.784

## Keep-outs
Top Layer:
  rectangle: 25.654,45.168 88.011,50.038
Bottom Layer:
  rectangle: 25.654,45.168 88.011,50.038

## Silkscreen, mask and mechanical layers (free items; w line width, h text height)
Top Overlay:
  text "SR_0" at 99.441,48.006 h0.76
  text "SCL" at 66.04,47.371 h0.76 r90
  text "GND" at 68.58,47.371 h0.76 r90
  text "VCC" at 58.42,47.244 h0.76 r90
  text "SDA" at 63.373,47.244 h0.76 r90
  text "3P" at 40.64,46.355 h0.76
  text "3N" at 43.18,46.355 h0.76
  text "3O" at 45.847,46.355 h0.76
  text "SR_7" at 121.666,46.355 h0.76
  text "GND" at 72.644,45.212 h0.76 r90
  text "GND" at 75.184,45.212 h0.76 r90
  text "BAT" at 77.851,45.212 h0.76 r90
  text "VCC" at 78.867,45.212 h0.76
  text "VCC" at 81.661,45.212 h0.76
  text "VCC" at 51.308,44.704 h0.76
  text "GND" at 34.671,44.45 h0.76
  text "PA2" at 78.486,40.767 h0.76
  text "PA4" at 81.407,40.767 h0.76
  text "ADC" at 61.468,38.481 h0.76
  text "GND" at 56.896,37.211 h0.76
  text "0" at 60.325,37.211 h0.76
  text "1" at 62.865,37.211 h0.76
  text "2" at 65.278,37.211 h0.76
  text "3" at 67.945,37.211 h0.76
  text "PA0" at 74.93,34.798 h0.76 r90
  text "PA2" at 77.47,34.798 h0.76 r90
  text "PA10" at 72.136,34.417 h0.76 r90
  text "4P" at 40.767,30.988 h0.76
  text "4N" at 43.307,30.988 h0.76
  text "4O" at 45.974,30.988 h0.76
  text "CHG" at 76.073,30.226 h0.76
  text "4" at 79.248,30.226 h0.76
  text "3" at 81.788,30.226 h0.76
  text "2" at 84.328,30.226 h0.76
  text "VCC" at 51.181,28.956 h0.76
  text "GND" at 34.544,28.702 h0.76
  text "TOUCH" at 79.121,27.305 h0.76
  text "GND" at 88.265,27.305 h0.76
Bottom Overlay:
  text "PROJECT TBD : PATRICK CHWALEK, DAVID RAMSAY" at 77.47,48.26 h1.2
  text "VERSION: 1.0    DATE: 5/2019" at 77.47,46.228 h1.2
  text "D" at 26.924,33.274 h0.76
  text "S" at 26.924,31.877 h0.76
  text "A" at 26.924,30.607 h0.76
  text "G" at 26.924,29.337 h0.76
  text "G" at 26.924,28.067 h0.76
Top Solder:
  lines w0.1: 83.82,50.165 95.377,50.165 ; 25.4,27.178 125.476,27.178 125.476,50.165 25.4,50.165 25.4,27.178
Mechanical (outline):
  the board outline again, w0.1

## Text inside footprints (layer, text, board x,y; h text height)
J11: Mechanical 1 "Board edge" at 74.207,27.373 h0.2